# Altium PCB ctrl_boardV1.1.PcbDoc
Units mil, origin at the board's own origin, x right, y up, seen from the top; angles counter-clockwise.
Board outline 3779.53 x 2559.06 mil, 2 copper layers (Top Layer, Bottom Layer); 109 components, 77 nets, 363 pads, 1706 vias.
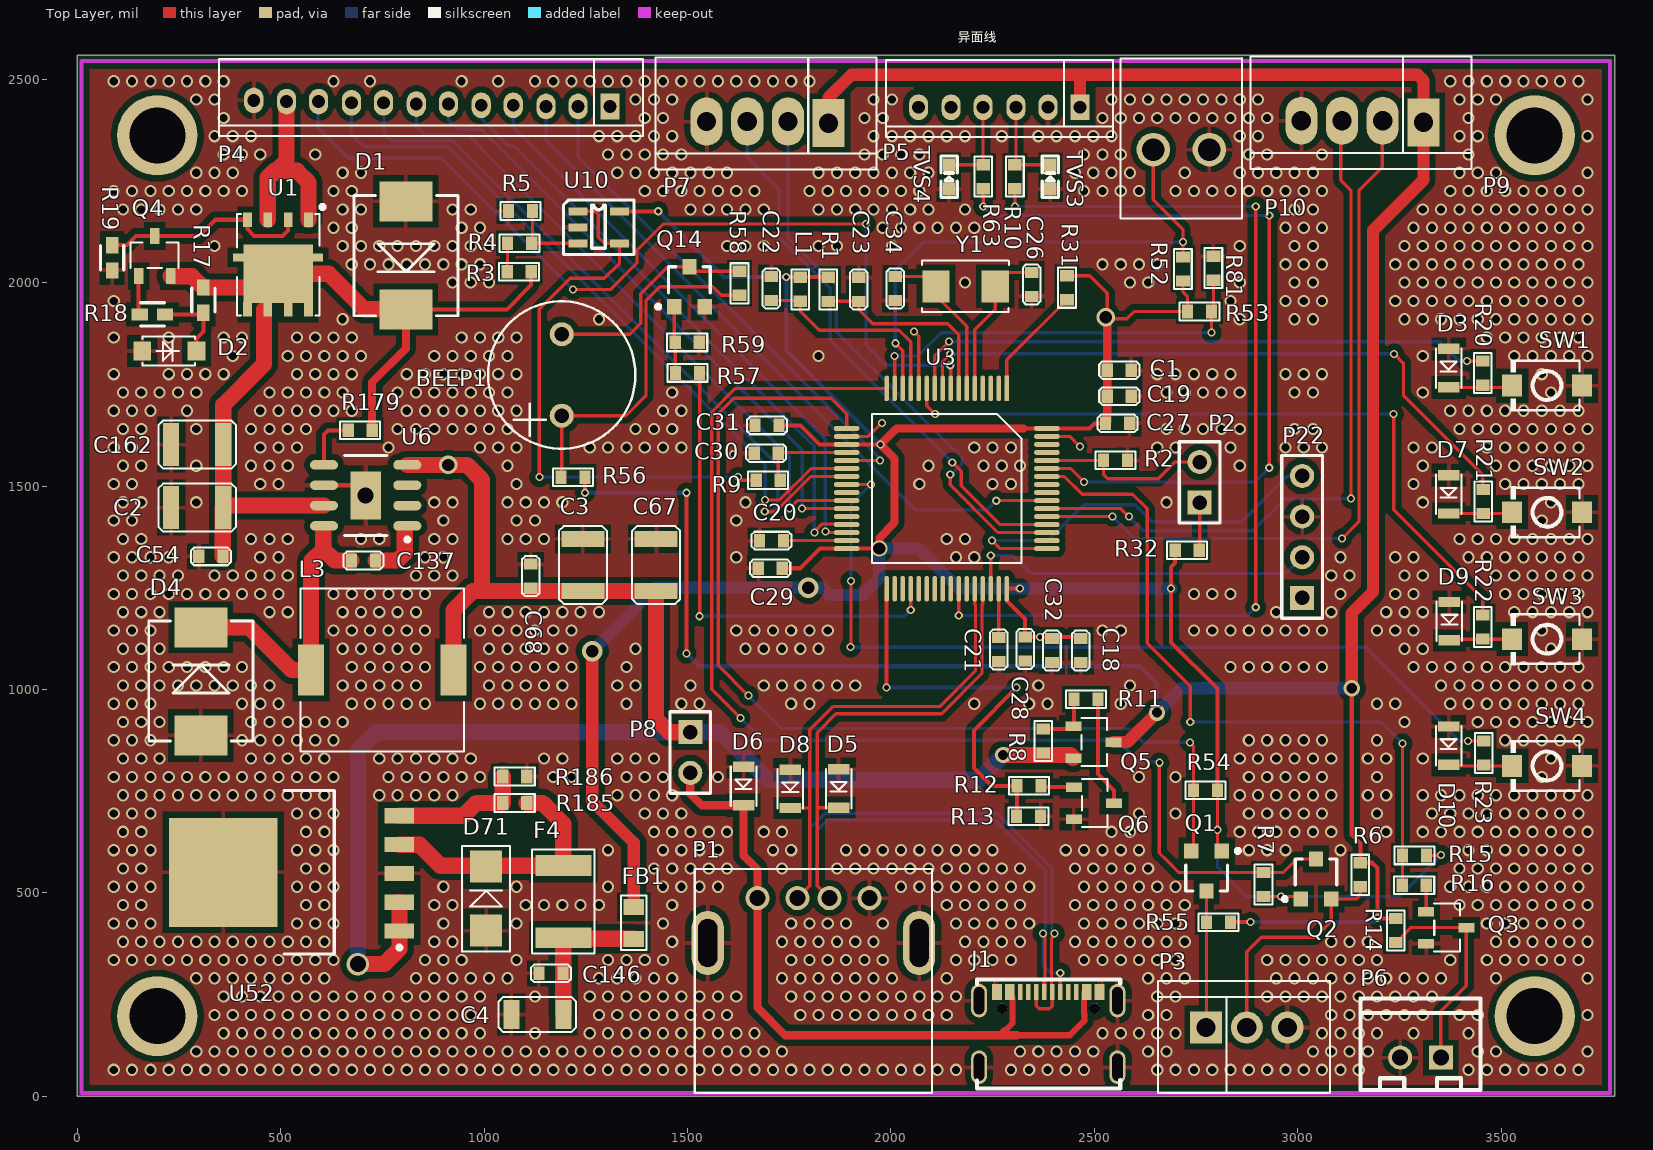
[diagram p0: Top Layer view]
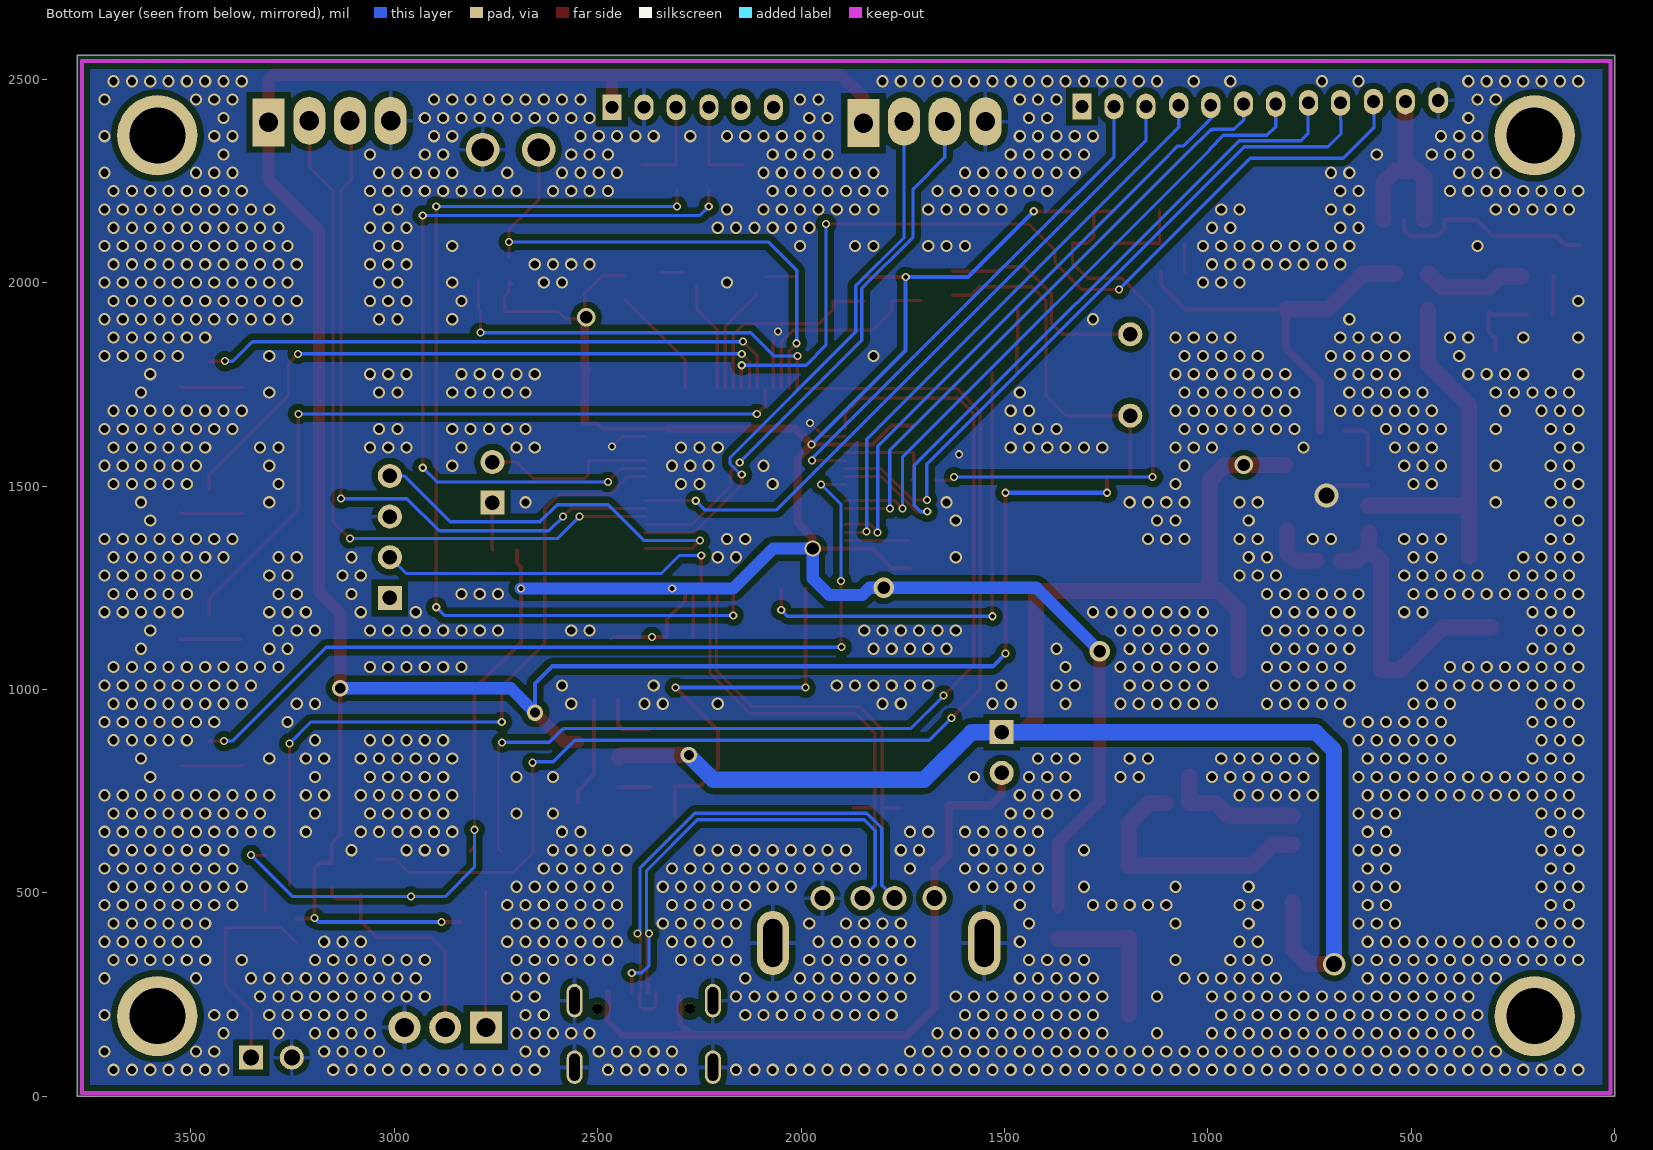
[diagram p1: Bottom Layer view, seen from below]

## Layer stack, top to bottom
Top Layer: signal copper 1.4
Dielectric: dielectric 12.6, FR-4, Dk 4.8
Bottom Layer: signal copper 1.4

## Board outline
0,0 3779.53,0 3779.53,2559.06 0,2559.06

## Design rules (kind name [scope] priority, off if disabled: settings)
Clearance Clearance_2 [USB_N And InPolygon] p1: gap=20
Clearance Clearance_1 [InPolygon] p2: gap=15
Clearance [All] p3: gap=5
DiffPairsRouting [All] p1: maxlimit=50 minlimit=8 mostfreqgap=8 maxuncoupledlength=500
PolygonConnect PolygonConnect_1 [IsVia] p1: connectstyle=Direct reliefconductorwidth=10 reliefentries=4 polygonreliefangle="90 Angle"
PolygonConnect [All] p2: connectstyle=Relief reliefconductorwidth=10 reliefentries=4 polygonreliefangle="90 Angle"
RoutingVias [All] p1: holewidth=28 width=50 viastyle="Through Hole" minholewidth=12 minwidth=20 maxholewidth=28 maxwidth=50
SilkscreenOverComponentPads [IsPad] p1: minsilkscreentomaskgap=2
SolderMaskExpansion [All] p1: expansion=4
Width [All] p1: maxlimit=200 minlimit=5 preferedwidth=10
26 further rules are at their usual default settings.

## Classes and differential pairs
component class connector: D5 D6 D8 J1 P1 P3 P4 P5 P6 P7 P9 Q1 Q2 Q3 R6 R7 R10 R14 R15 R16 R54 R55 R63 TVS3 TVS4
component class cpu: C1 C18 C19 C20 C21 C22 C23 C26 C27 C28 C29 C30 C31 C32 C34 D3 D7 D9 D10 FB1 L1 P2 P22 R1 R2 R3 R4 R5 R9 R20 R21 R22 R23 R31 R32 SW1 SW2 SW3 SW4 U3 U10 Y1
component class drv: BEEP1 Q14 R56 R57 R58 R59
component class power: C2 C3 C4 C54 C67 C68 C137 C146 C162 D1 D2 D4 D71 F4 L3 P8 Q4 Q5 Q6 R8 R11 R12 R13 R17 R18 R19 R179 R185 R186 U1 U6 U52
component class pt100: P10 R52 R53 R81
differential pair USB: +USB_P -USB_N

## Components (designator, comment, footprint, x,y, rotation, side; value= is the part's Value field where it differs from the comment)
BEEP1 "BEEP-9.5X5.5" BEEP-9.5X5.5 1191,1773 r90 top
C1 "0.1uF/50V/X5R" 0603C 2591,1785 r180 top
C2 "47uF/25V" 1210C 359,1447 r180 top
C3 "22uF/10V" 1210C 1243,1242 r90 top
C4 "47uF/25V" 1206C 1067,201 r0 top
C18 "1uF/50V/X5R" 0603C 2467,1066 r90 top
C19 "0.1uF/50V/X5R" 0603C 2591,1721 r180 top
C20 "0.1uF/50V/X5R" 0603C 1677,1366 r0 top
C21 "0.1uF/50V/X5R" 0603C 2265,1069 r90 top
C22 "0.1uF/50V/X5R" 0603C 1706,2015 r270 top
C23 "0.1uF/50V/X5R" 0603C 1921,2013 r270 top
C26 "12P 50V" 0603C 2346,1966 r90 top
C27 "1uF/50V/X5R" 0603C 2587,1654 r180 top
C28 "0.1uF/50V/X5R" 0603C 2330,1070 r90 top
C29 "1uF/50V/X5R" 0603C 1674,1298 r0 top
C30 "0.1uF/50V/X5R" 0603C 1664,1581 r0 top
C31 "1uF/50V/X5R" 0603C 1666,1649 r0 top
C32 "0.1uF/50V/X5R" 0603C 2396,1066 r90 top
C34 "12P 50V" 0603C 2011,1956 r90 top
C54 "1uF/50V/X5R" 0603C 299,1327 r0 top
C67 "22uF/10V" 1210C 1423,1242 r90 top
C68 "0.1uF/50V/X5R" 0603C 1115,1249 r90 top
C137 "0.01uF/50V" 0603C 674,1317 r0 top
C146 "0.1uF/50V/X5R" 0603C 1135,302 r0 top
C162 "47uF/25V" 1210C 359,1602 r180 top
D1 "SMCJ18CA" SMC 808,2200 r270 top
D2 "BZT52C18" sod123 160,1832 r0 top
D3 "CESDB5V0D3" SOD323 3371,1837 r270 top
D4 "SS54" SMC 304,887 r90 top
D5 "CESDB5V0D3" SOD323 1872,804 r270 top
D6 "CESDB5V0D3" SOD323 1638,810 r270 top
D7 "CESDB5V0D3" SOD323 3371,1527 r270 top
D8 "CESDB5V0D3" SOD323 1753,803 r270 top
D9 "CESDB5V0D3" SOD323 3373,1215 r270 top
D10 "CESDB5V0D3" SOD323 3371,909 r270 top
D71 "5.1V" SMA 1005,407 r90 top
F4 "1812L200/16GR" 1812-F 1195,567 r270 top
FB1 "JWWBW2012 M600HT" 0805CZ 1368,387 r90 top
J1 "TYPE C_16P" TYPEC_16P 2387,87 r0 top
L1 "MPZ1608D101BTA00" 0603R 1777,1954 r90 top
L3 "CDRH105NP-100NC" CDRH105 549,847 r90 top
P1 "Header 6" USB-A 1672,487 r0 top
P2 "Header 2" HDR1X2 2759,1459 r90 top
P3 "Header 3" 3X2.54MMZ 2775,169 r0 top
P4 "Header 12" 12X2MMZ 1310,2433 r180 top
P5 "Header 6" 6X2MMZ 2465,2431 r180 top
P6 "SIP-2" SIP-2A 3302,95 r180 top
P7 "Header 4" 4X2.54MMZ 1847,2392 r180 top
P8 "Header 2" HDR1X2 1507,895 r270 top
P9 "Header 4" 4X2.54MMZ 3309,2394 r180 top
P10 "Header 2" KF250NH-3.5-2P 2783,2327 r180 top
P22 "Header 4" HDR1X4 3011,1225 r90 top
Q1 "AO3400" SOT-23 2776,554 r180 top
Q2 "AO3400" SOT-23 3045,534 r0 top
Q3 "AO3400" SOT23-3 3316,454 r180 top
Q4 "MMBT4403-7-F" SOT23-3 151,2016 r270 top
Q5 "SI2301" SOT23-3 2449,910 r180 top
Q6 "S8050" SOT23-3 2450,760 r180 top
Q14 "LH8050QLT1G" SOT-23 1505,1990 r0 top
R1 "10K" 0603R 1846,2013 r270 top
R2 "10K" 0603R 2523,1563 r0 top
R3 "100K" 0603R 1116,2027 r180 top
R4 "100K" 0603R 1058,2097 r0 top
R5 "20K" 0603R 1119,2176 r180 top
R6 "10K" 0603r 3154,515 r90 top
R7 "10K" 0603r 2916,491 r90 top
R8 "100K" 0603R 2375,903 r270 top
R9 "49.9" 0603R 1669,1514 r0 top
R10 "100R" 0603R 2305,2290 r270 top
R11 "1K" 0603R 2509,976 r180 top
R12 "1K" 0603R 2369,763 r180 top
R13 "10K" 0603R 2309,688 r0 top
R14 "10K" 0603R 3241,378 r90 top
R15 "1k/1%" 0603R 3317,592 r180 top
R16 "1k/1%" 0603R 3316,519 r180 top
R17 "100k" RESC1608X055N_0603 310,1957 r90 top
R18 "1k/1%" RESC1608X055N_0603 185,1922 r180 top
R19 "10k" RESC1608X055N_0603 86,2061 r270 top
R20 "1k/1%" 0603R 3455,1748 r90 top
R21 "1k/1%" 0603R 3456,1432.51 r90 top
R22 "1k/1%" 0603R 3455,1124 r90 top
R23 "1k/1%" 0603R 3457,814 r90 top
R31 "100K" 0603R 2433,2017 r270 top
R32 "10K" 0603R 2758,1342 r180 top
R52 "2K/1%" 0603R 2718,2063 r270 top
R53 "2K/1%" 0603R 2788,1929 r180 top
R54 "10K" 0603r 2744,752 r0 top
R55 "10K" 0603r 2776,428 r0 top
R56 "51R" 0603R 1189,1522 r0 top
R57 "4.7K" 0603R 1530,1778 r180 top
R58 "1k/1%" 0603R 1628,2028 r270 top
R59 "47K" 0603R 1470,1853 r0 top
R63 "100R" 0603R 2227,2290 r270 top
R81 "75" 0603R 2793,2065 r270 top
R179 "100K" 0603R 666,1637 r0 top
R185 "120K/1%" 0603R 1105,721 r180 top
R186 "71.5K/1%" 0603R 1105,786 r180 top
SW1 "SW PUSHBUTTON" SW-SMD_L3.9-W3.0-P4.45 3613,1747 r180 top
SW2 "SW PUSHBUTTON" SW-SMD_L3.9-W3.0-P4.45 3613,1435.33 r180 top
SW3 "SW PUSHBUTTON" SW-SMD_L3.9-W3.0-P4.45 3613,1123.67 r180 top
SW4 "SW PUSHBUTTON" SW-SMD_L3.9-W3.0-P4.45 3613,812 r180 top
TVS3 "ESD5Z5.0CT1G" SOD-523 2392,2260 r90 top
TVS4 "ESD5Z5.0CT1G" SOD-523 2143,2260 r90 top
U1 "Si7997DP" "PowerPAK SO-8" 595,2192 r270 top
U3 "STM32F405RGT6" LQFP-64 2285,1740 r270 top
U6 "LM22676MRE-5.0/NOPB" SOP127P600X168_HS-8N 709,1477 r180 top
U10 "AD8615AUJZ-R2" sot-23-5 1282,2136 r0 top
U52 "MIC29302" TO228P1435X457-6N 792,406 r180 top
Y1 "8MHz" CRAY_5032 2111,1991 r0 top

## Footprints (in the part's own frame and the unit in brackets; to place one, negate y for a bottom-side part, rotate by r counter-clockwise, add the part's x,y. Pads: shape width x height; smd on the part's side, far side on the other; paste and mask are expansions set on the pad)
3X2.54MMZ [mm]
  rect 2x2 hole 1.2: 1(0,0)
  round 2 hole 1.2: 2(2.54,0) 3(5.08,0)
  silkscreen extent -3,-4.1 7.75,2.9
4X2.54MMZ [mm]
  rect 2x3 hole 1.2: 1(0,0)
  oval 2x3 hole 1.2: 2(2.54,-0.1) 3(5.08,-0.1) 4(7.62,-0.1)
  silkscreen extent -3,-4.1 10.79,2.9
6X2MMZ [mm]
  rect 1.2x1.6 hole 0.8: 1(0,0)
  oval 1.2x1.6 hole 0.8: 2(2,0) 3(4,0) 4(6.05,0) 5(8.05,0) 6(10.08,0)
  silkscreen extent -2.05,-2.95 12.12,1.85
12X2MMZ [mm]
  rect 1.2x1.6 hole 0.8: 1(0,0)
  oval 1.2x1.6 hole 0.8: 2(2,0) 3(4,0) 4(6.05,-0.076) 5(8.05,-0.076) 6(10.1,-0.152) 7(12.1,-0.152) 8(14.15,-0.229) 9(16.15,-0.229) 10(18.2,-0.305) 11(20.2,-0.305) 12(22.25,-0.381)
  silkscreen extent -2.05,-2.95 24.43,1.85
0603C [mm]
  rect 0.7x0.85 smd: 1(0,0) 2(1.5,0)
  silkscreen extent -0.5,-0.55 2,0.55
0603R [mm]
  rect 0.7x0.85 smd: 1(0,0) 2(1.5,0)
  silkscreen extent -0.5,-0.55 2,0.55
0603r [mm]
  rect 0.7x0.85 smd: 1(0,0) 2(1.5,0)
  silkscreen extent -0.5,-0.55 2,0.55
0805CZ [mm]
  rect 1x1.3 smd: 1(0,0) 2(2,0)
  silkscreen extent -0.7,-0.8 2.7,0.8
1206C [mm]
  rect 1x1.8 smd: 1(0,0) 2(3.25,0)
  silkscreen extent -0.8,-1.1 4.05,1.1
1210C [mm]
  rect 1x2.7 smd: 1(0,0) 2(3.25,0)
  silkscreen extent -0.8,-1.5 4.05,1.5
1812-F [mm]
  rect 1.3x3.5 smd: 1(0,0) 2(4.5,0)
  silkscreen extent -1,-1.95 5.5,1.95
BEEP-9.5X5.5 [mm]
  round 1.5 hole 0.9: 1(-2.54,0) 2(2.54,0)
  silkscreen extent -4.6,-4.6 4.6,4.6
CDRH105 [mm]
  rect 3.2x1.6 smd: 1(5.1,-0.65) 2(5.1,-9.55)
  silkscreen extent 0,-10.2 10.2,0
CRAY_5032 [mm]
  rect 1.7x2 smd: 1(0,0) 2(3.7,0)
  silkscreen extent -0.86,-1.6 4.55,1.6
HDR1X2 [mm] "Connector; Header; 2 Position"
  rect 1.5x1.5 hole 0.9: 1(0,0)
  round 1.5 hole 0.9: 2(2.54,0)
  silkscreen extent -1.27,-1.27 3.81,1.27
HDR1X4 [mm] "Connector; Header; 4 Position"
  rect 1.5x1.5 hole 0.9: 1(0,0)
  round 1.5 hole 0.9: 2(2.54,0) 3(5.08,0) 4(7.62,0)
  silkscreen extent -1.27,-1.27 8.89,1.27
KF250NH-3.5-2P [mm]
  round 2.1 hole 1.41: 1(0,0) 2(3.5,0)
  silkscreen extent -2.05,-5.71 5.55,4.3
LQFP-64 [mm]
  rect 1.6x0.3 smd: 1(0,0)
  oval 1.6x0.3 smd: 2(0,-0.5) 3(0,-1) 4(0,-1.5) 5(0,-2) 6(0,-2.5) 7(0,-3) 8(0,-3.5) 9(0,-4) 10(0,-4.5) 11(0,-5) 12(0,-5.5) 13(0,-6) 14(0,-6.5) 15(0,-7) 16(0,-7.5) 33(12.5,-7.5) 34(12.5,-7) 35(12.5,-6.5) 36(12.5,-6) 37(12.5,-5.5) 38(12.5,-5) 39(12.5,-4.5) 40(12.5,-4) 41(12.5,-3.5) 42(12.5,-3) 43(12.5,-2.5) 44(12.5,-2) 45(12.5,-1.5) 46(12.5,-1) 47(12.5,-0.5) 48(12.5,0)
  oval 0.3x1.6 smd: 17(2.5,-10) 18(3,-10) 19(3.5,-10) 20(4,-10) 21(4.5,-10) 22(5,-10) 23(5.5,-10) 24(6,-10) 25(6.5,-10) 26(7,-10) 27(7.5,-10) 28(8,-10) 29(8.5,-10) 30(9,-10) 31(9.5,-10) 32(10,-10) 49(10,2.5) 50(9.5,2.5) 51(9,2.5) 52(8.5,2.5) 53(8,2.5) 54(7.5,2.5) 55(7,2.5) 56(6.5,2.5) 57(6,2.5) 58(5.5,2.5) 59(5,2.5) 60(4.5,2.5) 61(4,2.5) 62(3.5,2.5) 63(3,2.5) 64(2.5,2.5)
  silkscreen extent 1.59,-8.41 10.91,0.91
"PowerPAK SO-8" [mm]
  rect 0.9x0.54 smd: 1(0.95,-0.67) 2(0.95,-1.94) 3(0.95,-3.21) 4(0.95,-4.48) 5(6.548,-4.48) 6(6.548,-3.21) 7(6.548,-1.94) 8(6.548,-0.67)
  rect 0.5x1.6 smd: 5(3.3,-4.575) 8(3.3,-0.575)
  rect 3.66x2.5 smd: 5(4.325,-3.495)
  rect 3.66x2 smd: 8(4.325,-1.401)
  silkscreen extent 0.03,-5.12 6.93,0.33
RESC1608X055N_0603 [mil] "Chip Resistor, 0603"
  round 10 on Mech3: 0(0,0)
  rect 40x30 smd: 1(-30.98,0) 2(30.98,0)
  silkscreen extent -30,-29 30,29, body extent -31,-16 31,16, height 22
SIP-2A [mm]
  rect 1.5x1.5 hole 1: 1(-1.27,0)
  round 1.5 hole 1: 2(1.27,0)
  silkscreen extent -3.75,-3.68 3.75,2.02, body extent -3.7,-3.81 3.7,2.29, height 7.5
SMA [mm]
  rect 2x2 smd: 1(0,0) 2(4,0)
  silkscreen extent -1.3,-1.5 5.3,1.5
SMC [mm]
  rect 2.5x3.3 smd: 1(0,0) 2(6.75,0)
  silkscreen extent -0.35,-3.25 7.15,3.25
sod123 [mm]
  rect 1.1x1.2 smd: 1(0,0) 2(3.385,0)
  silkscreen extent 0,-0.9 3.3,0.9
SOD323 [mm]
  rect 0.65x1.35 smd: 1(0,0) 2(2.4,0)
  silkscreen extent -0.03,-0.8 2.44,0.8
SOD-523 [mil]
  rect 31.5x30 smd: 1(-30,0) 2(30,0)
  silkscreen extent -51,-20 51,20, body extent -31,-16 31,16, height 26
SOP127P600X168_HS-8N [mm] "SOP, 8-Leads, Body 5.0x4.0mm (max), Pitch 1.27mm, IPC Medium Density"
  oval 1.75x0.6 smd: 1(-2.6,1.905) 2(-2.6,0.635) 3(-2.6,-0.635) 4(-2.6,-1.905) 5(2.6,-1.905) 6(2.6,-0.635) 7(2.6,0.635) 8(2.6,1.905)
  rect 1.9x3 smd: 9(0,0)
  silkscreen extent -2.73,-2.5 1.33,2.88, body extent -2,-2.5 2,2.5, height 1.68
SOT23-3 [mm] "SOT-23; 3 Leads; Body 3.0 x 2.6 mm, inc. leads (LxW max)"
  rect 1x0.6 smd: 1(0,0) 2(0,2) 3(-2.5,1)
  silkscreen extent -2.1,-0.5 -0.5,2.5
SOT-23 [mm] "SOT-23; 3 Leads; Body 3.0 x 2.6 mm, inc. leads (LxW max)"
  rect 0.9x0.95 smd: 1(-0.95,-1.25) 2(0.95,-1.25) 3(0,1.25)
  silkscreen extent -2.08,-1.37 1.3,1.25
sot-23-5 [mm]
  rect 1.2x0.5 smd: 1(-1.3,1) 2(-1.3,0) 3(-1.3,-1) 4(1.3,-1) 5(1.3,1)
  silkscreen extent -2.2,-1.7 2.2,1.7
SW-SMD_L3.9-W3.0-P4.45 [mm]
  rect 1.23x1.36 smd: 1(-2.185,0) 2(2.185,0)
  silkscreen extent -2.03,-1.62 2.25,1.62
TO228P1435X457-6N [mm] "D2-PAK, 6-Pads, Body 8.6x10.2mm (max), IPC Medium Density"
  rect 1.85x0.95 smd: 1(0,0) 2(0,-1.8) 3(0,-3.6) 4(0,-5.4) 5(0,-7.2)
  rect 6.8x6.8 smd: 6(11,-3.671)
  silkscreen extent -0.13,-8.77 7.2,1.43, body extent 4.2,-8.77 12.84,1.43, height 4.57
TYPEC_16P [mm]
  oval 1x2.1 hole 0.65 slot 1.7 at 90 deg: 1(-4.32,-0.391) 1(-4.32,3.759) 1(4.32,-0.391) 1(4.32,3.759)
  round 0.67 hole 0.67: 2(-2.89,3.259) 2(2.89,3.259)
  rect 0.3x1 smd: A1(-3.05,4.293) A4(-2.25,4.293) A5(-1.25,4.293) A6(-0.25,4.293) A7(0.25,4.293) A8(1.25,4.293) A9(2.25,4.293) A12(3.35,4.293) B1(3.05,4.293) B4(2.55,4.293) B5(1.75,4.293) B6(0.75,4.293) B7(-0.75,4.293) B8(-1.75,4.293) B9(-2.55,4.293) B12(-3.35,4.293)
  silkscreen extent -4.44,-1.73 4.49,5.07
USB-A [mm]
  round 1.5 hole 1: 1(0,0) 2(2.5,0) 3(4.5,0) 4(7,0)
  oval 2x4 hole 1.2 slot 3 at 90 deg: 5(-3.1,-2.8) 6(10.1,-2.8)
  silkscreen extent -3.91,-12.17 10.89,1.83

## Part data
C1 C18 C19 C20 C21 C22 C23 C26 C27 C28 C29 C30 C31 C32 C34: library part CAP4, "贴片电容 20%"
C2 C3 C54 C67 C68 C137 C162: library part CAP, "Capacitor"
C4 C146: library part Cap, "Capacitor"
D1 D3 D4 D5 D6 D7 D8 D9 D10 D71: library part "DIODE S", "Schottky Diode"
D2: library part BZT52C12S-7-F
F4: library part "Fuse 1", "Fuse"
FB1: library part FB
L1: library part CIZHU1, "磁珠电感 100R 100MHz"
L3: library part INDUCTOR
P1 P5: "Header, 6-Pin"
P2 P8: "Header, 2-Pin"
P3: "Header, 3-Pin"
P4: "Header, 12-Pin"
P6: "XH2.54 2P 立贴"
P7 P9 P22: "Header, 4-Pin"
Q1 Q2 Q3 Q14: library part NPN-1, "NPN"
Q4: library part OEM_Diodes_MMBT4403
Q5: library part MOSFET-P, "P-Channel MOSFET"
Q6: library part NPN, "NPN Bipolar Transistor"
R1 R2 R10 R31 R32 R63: library part RES2, "贴片电阻 5%"
R3 R4 R5 R8 R9 R11 R12 R13 R14 R15 R16 R179: library part Res1, "Resistor"
R6 R7 R54 R55: library part R, "贴片电阻 1%"
R17 R18 R19: library part Resistor_0603
R20 R21 R22 R23: library part RESISTOR_0
R52 R53 R81: library part R
R56 R57 R58 R59: library part RES0, "贴片电阻 5%"
R185 R186: library part R, "R"
TVS3 TVS4: library part TVS-1, "TVS"
U1: "Sia430DJ"
U3: library part STM32F405RG, "MCU"
U6: library part LM22676MR-5.0
U10: library part AD8615
Y1: library part XTAL, "晶振"

## Free pads (board coordinates)
  round 196.85 hole 137.8: 1(196.85,196.85) 1(196.85,2362.2) 1(3582.68,196.85) 1(3582.68,2362.2)

## Via types
v1: diameter 30, hole 20, Top Layer to Bottom Layer, tented both sides, 1622 vias
v2: diameter 20, hole 12, Top Layer to Bottom Layer, tented both sides, 74 vias
v3: diameter 40, hole 25, Top Layer to Bottom Layer, tented both sides, 3 vias
v4: diameter 45, hole 30, Top Layer to Bottom Layer, tented both sides, 2 vias
v5: diameter 50, hole 30, Top Layer to Bottom Layer, tented both sides, 2 vias
v6: diameter 59.06, hole 39.37, Top Layer to Bottom Layer, 1 vias
v7: diameter 55, hole 40, Top Layer to Bottom Layer, tented both sides, 1 vias
v8: diameter 40, hole 30, Top Layer to Bottom Layer, tented both sides, 1 vias

## Nets (pads, with @x,y where several pads share a name; then routed paths per layer and width w, separated by ;. In a path a pad name is that pad's centre, name@x,y a point inside that pad or via, vN(x,y) a via of type N, cw(c..) or ccw(c..) an arc to the next point about the centre after c; other vN are vias at no path point)
3.3V_MCU: P22.1
air_FREQ: R15.2 R16.2 U3.58 | length 1738.3
  Top Layer w8: U3.58 2426.54,1523.46 2470,1480 2594,1480 2630,1444 2630,1114 2736,1008 v2(2736,920) ; R16.2@3257.94,520 R15.2 v2(3257.94,867.06)
  Bottom Layer w8: v2(2736,920) 3205,920 v2(3257.94,867.06)
air_pwr: P4.10 U3.8 | length 2246.9
  Top Layer w8: v2(1219,1983) 1310,1983 1376,2049 1376,2080 1440,2144 v2(1939,2144) ; v2(2146,1797) 2147.2,1795.8 U3.8
  Bottom Layer w8: P4.10@595,2446 593,2446 592,2445 592,2381 667,2306 810.17,2306 815,2306 896,2306 v2(1219,1983) ; v2(1939,2144) 1939,1846 1988,1797 v2(2146,1797)
air_RXD: Q2.3 R7.2 U3.16 | length 3001.6
  Top Layer w8: 1560,1620 1560,1584 ; v2(1630,930) 1560,1000 1560,1584 ; U3.16 1618,1740 1560,1682 1560,1584 ; v2(2660,820) 2660,598 2684,574 ; 2673,585 2684,574 ; Q2.3 2998.21,583.21 2965.06,550.06 R7.2 2707.94,550.06 2684,574
  Bottom Layer w8: v2(1630,930) 1685,875 2556,875 2609,822 v2@2660,822
air_TXD: Q1.2 R54.1 U3.17 | length 2511.5
  Top Layer w8: v2(1650,985) 1576,1059 1576,1678 1614,1716 1853,1716 1891.3,1677.7 U3.17 ; v2(2735,870) 2744,861 R54.1 2744,608.61 Q1.2
  Bottom Layer w8: v2(1650,985) 1731,904 2583,904 2586,901 ; 2587,902 2619,870 v2(2735,870)
BAT_CHARGE: P4.11 U1.1 U1.3 | length 507.4
  Top Layer w40: U1.3 468.62,2258.62 485,2275 489,2275 ; 480,2266 489,2275 ; P4.11 514.72,2300.72 489,2275 ; 541,2274 568.62,2246.38 U1.1 ; 541,2275 489,2275
BATTERY: R9.1 U10.1 U10.4 | length 1409.6
  Top Layer w8: v2(1136,1522) 1136,1935 1212,2011 1296,2011 1333.18,2048.18 U10.4 1296.37,2096.63 1281,2112 1281,2168 1273.63,2175.37 U10.1 ; v2(1624,1522) 1632,1514 R9.1
  Bottom Layer w8: v2(1136,1522) v2(1624,1522)
ble_rxd: P7.3 U3.52 | length 1362.9
  Top Layer w8: v2(2151,1558) 2173,1536 2173,1501 2268.65,1405.35 U3.52
  Bottom Layer w8: P7.3 1647,2308 1725,2230 1725,2112 1851.1,1985.9 1851.1,1857.9 v2(2151,1558)
ble_txd: P7.2 U3.51 | length 1370.3
  Top Layer w8: v2(2146,1528) 2146,1503 2263.33,1385.67 U3.51
  Bottom Layer w8: P7.2 1747,2111 1866,1992 1866,1879 2174.94,1570.06 2174.94,1555.07 2147.87,1528 v2(2146,1528) v2@2146,1529
BOOT0: P2.2 R2.1 U3.60 | length 431.5
  Top Layer w8: U3.60 R2.1@2522.83,1562.83 ; R2.1 2523,1528 2533,1518 2657,1518 2698,1559 P2.2
cool1: P4.2 U3.21 | length 1259.6
  Top Layer w8: U3.21 v2(1973.17,1562.83)
  Bottom Layer w8: P4.2 1231.26,2308.74 1321,2219 ; 1321.5,2219.5 1973.17,1567.83 v2(1973.17,1562.83)
COOL2: P4.3 U3.55 | length 1700.7
  Top Layer w8: v2(2259,1464) 2259.41,1464.41 U3.55
  Bottom Layer w8: P4.3 1152.52,2348.48 1241,2260 ; 1241.5,2260.5 2061,1441 2236,1441 v2(2259,1464)
cool3: P4.5 U3.29 | length 1487.1
  Top Layer w8: v2(1812,1386) 1812,1387.87 1831.13,1407 1889.65,1407 U3.29
  Bottom Layer w8: P4.5 993.07,2402.93 1060,2336 1074,2336 1097,2313 ; 1096.91,2312.91 1812,1597.81 v2(1812,1386)
cool4: P4.4 U3.30 | length 1419
  Top Layer w8: v2(1839,1388) 1841.33,1385.67 U3.30
  Bottom Layer w8: P4.4 1071.81,2382.19 1839,1615 v2(1839,1388)
dec: R23.2 U3.24 | length 2130.1
  Top Layer w8: U3.24 v2(1950.78,1503.78) ; v2@1902,1105 v2(1902,1267) ; v2(3418.37,873.06) R23.2
  Bottom Layer w8: v2(1901,1104) 3167.74,1104 3398.68,873.06 v2(3418.37,873.06) ; v2(1902,1267) 1902,1455 v2(1950.78,1503.78)
GND: C1.1 C2.2 C3.2 C4.1 C18.1 C19.1 C20.1 C21.1 C22.1 C23.1 C26.1 C27.1 C28.1 C29.1 C30.1 C31.1 C32.1 C34.1 C54.1 C67.2 C68.2 C146.1 C162.2 D1.1 D2.1 D3.1 D4.1 D5.1 D6.1 D7.1 D8.1 D9.1 D10.1 D71.1 J1.1 J1.A1 J1.A12 J1.B1 J1.B12 P1.4 P1.5 P1.6 P3.3 P4.12 P5.2 P6.2 P7.4 P9.4 P10.1 P22.3 Q3.2 Q6.2 Q14.2 R2.2 R5.2 R13.2 R19.2 R59.2 R81.1 R186.1 SW1.1 SW2.1 SW3.1 SW4.1 TVS3.1 TVS4.1 U3.12 U3.18 U3.63 U6.6 U6.9 U10.2 U52.3 U52.6 | length 414.4
  Top Layer w8: U3.18 1944.89,1621.89 v2(1978,1655) ; v2(2057,1880) 2068.46,1868.54 U3.12 ; U3.63 2440.11,1621.89 v2(2465,1597)
  Top Layer w10: U6.6 U6.9@684,1502
  other v1: 90,65 135,65 180,65 225,65 270,65 315,65 360,65 405,65 450,65 495,65 540,65 585,65 630,65 675,65 720,65 765,65 810,65 855,65 900,65 945,65 990,65 1035,65 1080,65 1125,65 1170,65 1215,65 1260,65 1305,65 1350,65 1395,65 1440,65 1485,65 1530,65 1575,65 1620,65 1665,65 1710,65 1755,65 1800,65 1845,65 1890,65 1935,65 1980,65 2025,65 2070,65 2115,65 2160,65 2295,65 2340,65 2385,65 2430,65 2475,65 2655,65 2700,65 2745,65 2790,65 2835,65 2880,65 2925,65 2970,65 3015,65 3060,65 3105,65 3150,65 3420,65 3465,65 3510,65 3555,65 3600,65 3645,65 3690,65 292.5,110 337.5,110 382.5,110 427.5,110 472.5,110 517.5,110 562.5,110 607.5,110 652.5,110 697.5,110 742.5,110 787.5,110 832.5,110 877.5,110 922.5,110 967.5,110 1012.5,110 1057.5,110 1102.5,110 1147.5,110 1192.5,110 1237.5,110 1282.5,110 1327.5,110 1372.5,110 1417.5,110 1462.5,110 1507.5,110 1552.5,110 1597.5,110 1642.5,110 1687.5,110 1732.5,110 2317.5,110 2362.5,110 2407.5,110 2452.5,110 2497.5,110 2632.5,110 2677.5,110 3037.5,110 3082.5,110 3127.5,110 3172.5,110 3442.5,110 3487.5,110 3712.5,110 360,155 405,155 450,155 495,155 540,155 585,155 630,155 675,155 720,155 765,155 810,155 855,155 900,155 945,155 990,155 1125,155 1260,155 1305,155 1350,155 1395,155 1440,155 1485,155 1530,155 1575,155 1620,155 1665,155 2520,155 2565,155 2610,155 2655,155 2700,155 3060,155 3105,155 3150,155 3195,155 3285,155 3420,155 337.5,200 382.5,200 427.5,200 472.5,200 517.5,200 562.5,200 607.5,200 652.5,200 697.5,200 742.5,200 787.5,200 832.5,200 877.5,200 922.5,200 967.5,200 1282.5,200 1327.5,200 1372.5,200 1417.5,200 1462.5,200 1507.5,200 1552.5,200 1597.5,200 1777.5,200 1822.5,200 1867.5,200 1912.5,200 1957.5,200 2002.5,200 2047.5,200 2092.5,200 2137.5,200 2632.5,200 2677.5,200 3082.5,200 3127.5,200 3172.5,200 3217.5,200 3262.5,200 3307.5,200 3397.5,200 3442.5,200 3712.5,200 360,245 405,245 450,245 495,245 540,245 585,245 630,245 675,245 720,245 765,245 810,245 855,245 900,245 945,245 990,245 1125,245 1260,245 1305,245 1350,245 1395,245 1440,245 1485,245 1530,245 1575,245 1620,245 1755,245 1800,245 1845,245 1890,245 1935,245 1980,245 2025,245 2070,245 2115,245 2160,245 2655,245 2700,245 2925,245 2970,245 3015,245 3060,245 3105,245 3150,245 3195,245 3240,245 3285,245 3330,245 292.5,290 337.5,290 382.5,290 427.5,290 472.5,290 517.5,290 562.5,290 607.5,290 832.5,290 877.5,290 922.5,290 967.5,290 1012.5,290 1057.5,290 1282.5,290 1327.5,290 1372.5,290 1417.5,290 1462.5,290 1732.5,290 1777.5,290 1822.5,290 1867.5,290 1912.5,290 1957.5,290 2002.5,290 2137.5,290 2632.5,290 2677.5,290 2722.5,290 2947.5,290 2992.5,290 3037.5,290 3082.5,290 3127.5,290 3172.5,290 3217.5,290 3262.5,290 3307.5,290 3352.5,290 3487.5,290 3712.5,290 90,335 135,335 180,335 225,335 270,335 315,335 360,335 405,335 450,335 495,335 540,335 585,335 630,335 855,335 900,335 945,335 1080,335 1305,335 1350,335 1395,335 1440,335 1755,335 1800,335 1845,335 1890,335 1935,335 1980,335 2160,335 2205,335 2250,335 2295,335 2475,335 2520,335 2565,335 2610,335 2655,335 2700,335 2925,335 2970,335 3015,335 3060,335 3105,335 3150,335 3195,335 3375,335 3465,335 3510,335 3555,335 3600,335 3645,335 3690,335 112.5,380 157.5,380 202.5,380 247.5,380 292.5,380 337.5,380 382.5,380 427.5,380 472.5,380 517.5,380 562.5,380 607.5,380 877.5,380 922.5,380 1462.5,380 1732.5,380 1777.5,380 1822.5,380 1867.5,380 1912.5,380 1957.5,380 2182.5,380 2227.5,380 2272.5,380 2317.5,380 2452.5,380 2497.5,380 2542.5,380 2587.5,380 2632.5,380 2677.5,380 2722.5,380 3082.5,380 3127.5,380 3172.5,380 3487.5,380 3532.5,380 3577.5,380 3622.5,380 3667.5,380 3712.5,380 90,425 135,425 180,425 540,425 585,425 630,425 900,425 1080,425 1440,425 1755,425 1800,425 1845,425 1890,425 1980,425 2160,425 2205,425 2250,425 2295,425 2340,425 2475,425 2520,425 2565,425 2610,425 2655,425 2700,425 3465,425 3510,425 3555,425 3600,425 3645,425 3690,425 112.5,470 157.5,470 562.5,470 607.5,470 877.5,470 922.5,470 1102.5,470 1147.5,470 1192.5,470 1237.5,470 1282.5,470 1462.5,470 2137.5,470 2182.5,470 2227.5,470 2272.5,470 2317.5,470 2452.5,470 2497.5,470 2542.5,470 2587.5,470 2632.5,470 2677.5,470 2722.5,470 3397.5,470 3442.5,470 3487.5,470 3532.5,470 3577.5,470 3622.5,470 3667.5,470 3712.5,470 90,515 135,515 180,515 540,515 585,515 630,515 900,515 1080,515 1305,515 1440,515 1485,515 1530,515 1575,515 2025,515 2070,515 2115,515 2160,515 2205,515 2250,515 2295,515 2340,515 2475,515 2520,515 2565,515 2610,515 2655,515 2700,515 3375,515 3420,515 3465,515 3510,515 3555,515 3600,515 3645,515 3690,515 112.5,560 157.5,560 562.5,560 607.5,560 1417.5,560 1462.5,560 1507.5,560 1552.5,560 1597.5,560 1732.5,560 1867.5,560 1912.5,560 1957.5,560 2002.5,560 2047.5,560 2092.5,560 2137.5,560 2182.5,560 2227.5,560 2272.5,560 2317.5,560 2452.5,560 2497.5,560 2542.5,560 2587.5,560 2632.5,560 3397.5,560 3442.5,560 3487.5,560 3532.5,560 3577.5,560 3622.5,560 3667.5,560 3712.5,560 90,605 135,605 180,605 540,605 585,605 630,605 1305,605 1440,605 1485,605 1530,605 1575,605 1710,605 1755,605 1890,605 1935,605 1980,605 2025,605 2070,605 2115,605 2160,605 2205,605 2250,605 2430,605 2475,605 2520,605 2565,605 2610,605 2880,605 2925,605 2970,605 3105,605 3420,605 3465,605 3510,605 3555,605 3600,605 3645,605 3690,605 112.5,650 157.5,650 562.5,650 607.5,650 1417.5,650 1462.5,650 1507.5,650 1552.5,650 1597.5,650 1687.5,650 1732.5,650 2542.5,650 2587.5,650 2857.5,650 2902.5,650 2947.5,650 2992.5,650 3037.5,650 3082.5,650 3217.5,650 3307.5,650 3352.5,650 3397.5,650 3442.5,650 3487.5,650 3532.5,650 3577.5,650 3622.5,650 3667.5,650 3712.5,650 90,695 135,695 180,695 540,695 585,695 630,695 1395,695 1440,695 1485,695 2610,695 2700,695 2880,695 2925,695 2970,695 3015,695 3060,695 3195,695 3330,695 3375,695 3420,695 3465,695 3510,695 3555,695 3600,695 3645,695 3690,695 112.5,740 157.5,740 202.5,740 247.5,740 292.5,740 337.5,740 382.5,740 427.5,740 472.5,740 517.5,740 562.5,740 607.5,740 742.5,740 787.5,740 832.5,740 877.5,740 922.5,740 1327.5,740 1372.5,740 1417.5,740 1462.5,740 2857.5,740 2902.5,740 2947.5,740 2992.5,740 3037.5,740 3082.5,740 3172.5,740 3217.5,740 3307.5,740 3352.5,740 3397.5,740 3442.5,740 3487.5,740 3532.5,740 3577.5,740 3622.5,740 3667.5,740 3712.5,740 90,785 135,785 180,785 225,785 270,785 315,785 360,785 405,785 450,785 495,785 540,785 585,785 630,785 765,785 810,785 855,785 900,785 945,785 990,785 1170,785 1215,785 1350,785 1395,785 1440,785 1575,785 2610,785 2700,785 2880,785 2925,785 2970,785 3015,785 3060,785 3195,785 3600,785 112.5,830 157.5,830 202.5,830 427.5,830 472.5,830 517.5,830 562.5,830 607.5,830 742.5,830 787.5,830 832.5,830 877.5,830 922.5,830 967.5,830 1147.5,830 1192.5,830 1327.5,830 1372.5,830 1417.5,830 2857.5,830 2902.5,830 2947.5,830 2992.5,830 3037.5,830 3082.5,830 3172.5,830 3217.5,830 3307.5,830 3622.5,830 90,875 135,875 180,875 405,875 450,875 495,875 540,875 585,875 630,875 2880,875 2925,875 2970,875 3015,875 3060,875 3195,875 3510,875 3555,875 3600,875 3645,875 3690,875 112.5,920 157.5,920 202.5,920 427.5,920 472.5,920 517.5,920 562.5,920 607.5,920 652.5,920 3262.5,920 3442.5,920 3487.5,920 3532.5,920 3577.5,920 3622.5,920 3667.5,920 3712.5,920 90,965 135,965 180,965 405,965 450,965 495,965 675,965 720,965 765,965 810,965 855,965 990,965 1035,965 1080,965 1125,965 1170,965 1215,965 1350,965 1485,965 1530,965 1755,965 1800,965 2205,965 2340,965 2385,965 2565,965 3195,965 3240,965 3375,965 3420,965 3465,965 3510,965 3555,965 3600,965 3645,965 3690,965 112.5,1010 157.5,1010 202.5,1010 247.5,1010 292.5,1010 337.5,1010 382.5,1010 427.5,1010 472.5,1010 652.5,1010 697.5,1010 742.5,1010 787.5,1010 832.5,1010 1012.5,1010 1057.5,1010 1102.5,1010 1147.5,1010 1192.5,1010 1327.5,1010 1372.5,1010 1507.5,1010 1687.5,1010 1732.5,1010 1777.5,1010 1822.5,1010 1867.5,1010 1912.5,1010 2362.5,1010 2587.5,1010 3352.5,1010 3397.5,1010 3442.5,1010 3487.5,1010 3532.5,1010 3577.5,1010 3622.5,1010 3667.5,1010 3712.5,1010 90,1055 135,1055 180,1055 225,1055 270,1055 315,1055 360,1055 405,1055 675,1055 720,1055 765,1055 810,1055 855,1055 990,1055 1035,1055 1080,1055 1125,1055 1170,1055 1215,1055 1350,1055 2835,1055 2880,1055 2925,1055 2970,1055 3015,1055 3060,1055 3285,1055 3330,1055 3375,1055 3420,1055 3465,1055 3510,1055 3555,1055 3600,1055 3645,1055 3690,1055 112.5,1100 157.5,1100 202.5,1100 652.5,1100 697.5,1100 742.5,1100 787.5,1100 832.5,1100 1012.5,1100 1057.5,1100 1102.5,1100 1147.5,1100 1192.5,1100 1372.5,1100 1642.5,1100 1687.5,1100 1732.5,1100 1777.5,1100 1822.5,1100 3262.5,1100 3307.5,1100 3622.5,1100 90,1145 135,1145 180,1145 630,1145 675,1145 720,1145 765,1145 810,1145 855,1145 990,1145 1035,1145 1080,1145 1125,1145 1170,1145 1215,1145 1620,1145 1665,1145 1710,1145 1755,1145 1800,1145 1845,1145 2520,1145 2565,1145 2745,1145 2790,1145 2835,1145 2880,1145 2925,1145 2970,1145 3015,1145 3060,1145 3195,1145 3240,1145 3285,1145 3600,1145 112.5,1190 157.5,1190 202.5,1190 472.5,1190 517.5,1190 652.5,1190 697.5,1190 742.5,1190 787.5,1190 832.5,1190 1012.5,1190 1057.5,1190 1102.5,1190 1147.5,1190 1192.5,1190 1237.5,1190 1282.5,1190 2947.5,1190 3082.5,1190 3217.5,1190 3262.5,1190 3307.5,1190 3532.5,1190 3577.5,1190 3622.5,1190 3667.5,1190 3712.5,1190 90,1235 135,1235 180,1235 225,1235 270,1235 315,1235 360,1235 405,1235 450,1235 495,1235 630,1235 675,1235 720,1235 765,1235 810,1235 855,1235 2745,1235 2790,1235 2835,1235 3105,1235 3240,1235 3285,1235 3510,1235 3555,1235 3600,1235 3645,1235 3690,1235 112.5,1280 157.5,1280 202.5,1280 247.5,1280 337.5,1280 382.5,1280 427.5,1280 472.5,1280 517.5,1280 832.5,1280 877.5,1280 922.5,1280 3082.5,1280 3127.5,1280 3262.5,1280 3307.5,1280 3487.5,1280 3532.5,1280 3577.5,1280 3622.5,1280 3667.5,1280 3712.5,1280 90,1325 135,1325 180,1325 225,1325 450,1325 495,1325 855,1325 900,1325 1620,1325 2160,1325 2205,1325 3105,1325 3240,1325 3285,1325 3420,1325 3465,1325 3510,1325 3555,1325 3600,1325 3645,1325 3690,1325 112.5,1370 157.5,1370 427.5,1370 472.5,1370 517.5,1370 697.5,1370 742.5,1370 877.5,1370 922.5,1370 1057.5,1370 1102.5,1370 1147.5,1370 2137.5,1370 2182.5,1370 3397.5,1370 3442.5,1370 3487.5,1370 3532.5,1370 3577.5,1370 3622.5,1370 3667.5,1370 3712.5,1370 90,1415 135,1415 900,1415 1080,1415 1125,1415 1620,1415 3600,1415 112.5,1460 157.5,1460 292.5,1460 877.5,1460 922.5,1460 1057.5,1460 1102.5,1460 1147.5,1460 1192.5,1460 1642.5,1460 2677.5,1460 3307.5,1460 3622.5,1460 90,1505 135,1505 450,1505 495,1505 1080,1505 2070,1505 2250,1505 2295,1505 3285,1505 3510,1505 3555,1505 3600,1505 3645,1505 3690,1505 112.5,1550 157.5,1550 292.5,1550 427.5,1550 472.5,1550 517.5,1550 1057.5,1550 2092.5,1550 2227.5,1550 2272.5,1550 2317.5,1550 2857.5,1550 3307.5,1550 3487.5,1550 3532.5,1550 3577.5,1550 3622.5,1550 3667.5,1550 3712.5,1550 90,1595 135,1595 450,1595 495,1595 540,1595 765,1595 990,1595 1035,1595 1080,1595 1260,1595 1305,1595 1350,1595 1395,1595 1440,1595 1485,1595 2205,1595 2250,1595 2295,1595 2655,1595 2700,1595 2835,1595 2970,1595 3015,1595 3060,1595 3285,1595 3330,1595 3465,1595 3510,1595 3555,1595 3600,1595 3645,1595 3690,1595 112.5,1640 157.5,1640 292.5,1640 427.5,1640 472.5,1640 517.5,1640 562.5,1640 787.5,1640 832.5,1640 877.5,1640 922.5,1640 967.5,1640 1012.5,1640 1057.5,1640 1372.5,1640 1417.5,1640 1462.5,1640 2677.5,1640 2722.5,1640 2767.5,1640 2812.5,1640 2857.5,1640 2992.5,1640 3037.5,1640 3397.5,1640 3442.5,1640 3487.5,1640 3532.5,1640 3577.5,1640 3622.5,1640 3667.5,1640 3712.5,1640 90,1685 135,1685 180,1685 270,1685 450,1685 495,1685 540,1685 585,1685 630,1685 675,1685 810,1685 855,1685 900,1685 945,1685 990,1685 1035,1685 1080,1685 1440,1685 1485,1685 3375,1685 3420,1685 3465,1685 3510,1685 3555,1685 3600,1685 3645,1685 3690,1685 112.5,1730 157.5,1730 202.5,1730 247.5,1730 292.5,1730 472.5,1730 517.5,1730 562.5,1730 607.5,1730 652.5,1730 787.5,1730 832.5,1730 877.5,1730 922.5,1730 967.5,1730 1012.5,1730 1057.5,1730 1462.5,1730 2677.5,1730 2722.5,1730 2767.5,1730 2812.5,1730 2857.5,1730 2992.5,1730 3037.5,1730 3307.5,1730 3622.5,1730 90,1775 225,1775 270,1775 315,1775 360,1775 540,1775 585,1775 630,1775 675,1775 810,1775 855,1775 900,1775 945,1775 990,1775 1035,1775 1080,1775 2655,1775 2700,1775 2745,1775 2790,1775 2835,1775 2970,1775 3015,1775 3060,1775 3600,1775 382.5,1820 517.5,1820 562.5,1820 607.5,1820 652.5,1820 697.5,1820 877.5,1820 922.5,1820 967.5,1820 1012.5,1820 1057.5,1820 1822.5,1820 3307.5,1820 3532.5,1820 3577.5,1820 3622.5,1820 3667.5,1820 3712.5,1820 90,1865 225,1865 360,1865 405,1865 540,1865 585,1865 630,1865 675,1865 945,1865 990,1865 1035,1865 1080,1865 3465,1865 3510,1865 3555,1865 3600,1865 3645,1865 3690,1865 652.5,1910 1282.5,1910 2857.5,1910 2992.5,1910 3037.5,1910 3262.5,1910 3307.5,1910 3352.5,1910 3397.5,1910 3442.5,1910 3487.5,1910 3532.5,1910 3577.5,1910 3622.5,1910 3667.5,1910 3712.5,1910 90,1955 2835,1955 2970,1955 3015,1955 3060,1955 3240,1955 3285,1955 3330,1955 3375,1955 3420,1955 3465,1955 3510,1955 3555,1955 3600,1955 3645,1955 3690,1955 922.5,2000 967.5,2000 1012.5,2000 2182.5,2000 2587.5,2000 2632.5,2000 2857.5,2000 2992.5,2000 3037.5,2000 3262.5,2000 3307.5,2000 3352.5,2000 3397.5,2000 3442.5,2000 3487.5,2000 3532.5,2000 3577.5,2000 3622.5,2000 3667.5,2000 3712.5,2000 675,2045 720,2045 765,2045 810,2045 855,2045 900,2045 945,2045 990,2045 2520,2045 2565,2045 2610,2045 2655,2045 2970,2045 3015,2045 3060,2045 3240,2045 3285,2045 3330,2045 3375,2045 3420,2045 3465,2045 3510,2045 3555,2045 3600,2045 3645,2045 3690,2045 337.5,2090 652.5,2090 697.5,2090 742.5,2090 787.5,2090 832.5,2090 877.5,2090 922.5,2090 967.5,2090 1012.5,2090 1597.5,2090 1642.5,2090 1687.5,2090 1822.5,2090 1867.5,2090 2002.5,2090 2857.5,2090 2992.5,2090 3037.5,2090 3262.5,2090 3307.5,2090 3352.5,2090 3397.5,2090 3442.5,2090 3487.5,2090 3532.5,2090 3577.5,2090 3622.5,2090 3667.5,2090 3712.5,2090 630,2135 675,2135 945,2135 990,2135 1980,2135 2025,2135 2070,2135 2115,2135 2160,2135 2205,2135 2970,2135 3015,2135 3060,2135 3285,2135 3330,2135 3375,2135 3420,2135 3465,2135 3510,2135 3555,2135 3600,2135 3645,2135 3690,2135 112.5,2180 157.5,2180 202.5,2180 247.5,2180 292.5,2180 652.5,2180 697.5,2180 922.5,2180 967.5,2180 1507.5,2180 1552.5,2180 1597.5,2180 1642.5,2180 1687.5,2180 1822.5,2180 1867.5,2180 1912.5,2180 1957.5,2180 2002.5,2180 2047.5,2180 2092.5,2180 2182.5,2180 2992.5,2180 3037.5,2180 3307.5,2180 3352.5,2180 3397.5,2180 3442.5,2180 3487.5,2180 3532.5,2180 3577.5,2180 3622.5,2180 3667.5,2180 3712.5,2180 90,2225 135,2225 180,2225 225,2225 270,2225 315,2225 360,2225 405,2225 630,2225 675,2225 1395,2225 1440,2225 1485,2225 1530,2225 1575,2225 1620,2225 1665,2225 1800,2225 1845,2225 1890,2225 1935,2225 1980,2225 2025,2225 2070,2225 2475,2225 2520,2225 2565,2225 2610,2225 2700,2225 2745,2225 2790,2225 2835,2225 2880,2225 2925,2225 2970,2225 3015,2225 3060,2225 3375,2225 3420,2225 3465,2225 3510,2225 3555,2225 3600,2225 3645,2225 3690,2225 292.5,2270 337.5,2270 382.5,2270 652.5,2270 697.5,2270 1327.5,2270 1372.5,2270 1417.5,2270 1462.5,2270 1507.5,2270 1552.5,2270 1597.5,2270 1822.5,2270 1867.5,2270 1912.5,2270 1957.5,2270 2002.5,2270 2047.5,2270 2092.5,2270 2452.5,2270 2497.5,2270 2542.5,2270 2587.5,2270 2722.5,2270 2857.5,2270 2902.5,2270 2947.5,2270 2992.5,2270 3037.5,2270 3397.5,2270 3442.5,2270 3487.5,2270 3712.5,2270 360,2315 405,2315 450,2315 585,2315 1305,2315 1350,2315 1395,2315 1440,2315 1485,2315 1935,2315 1980,2315 2025,2315 2070,2315 2475,2315 2520,2315 2565,2315 2880,2315 2925,2315 3060,2315 3420,2315 337.5,2360 382.5,2360 427.5,2360 1282.5,2360 1327.5,2360 1372.5,2360 1417.5,2360 1462.5,2360 1957.5,2360 2002.5,2360 2047.5,2360 2092.5,2360 2137.5,2360 2182.5,2360 2272.5,2360 2362.5,2360 2407.5,2360 2452.5,2360 2497.5,2360 2542.5,2360 2857.5,2360 2902.5,2360 3397.5,2360 3442.5,2360 3712.5,2360 360,2405 1395,2405 1440,2405 1935,2405 1980,2405 2520,2405 2565,2405 2610,2405 2655,2405 2700,2405 2745,2405 2790,2405 2835,2405 2880,2405 2925,2405 3420,2405 292.5,2450 337.5,2450 1372.5,2450 1417.5,2450 1462.5,2450 1957.5,2450 2002.5,2450 2542.5,2450 2587.5,2450 2632.5,2450 2677.5,2450 2722.5,2450 2767.5,2450 2812.5,2450 2857.5,2450 2902.5,2450 3397.5,2450 3442.5,2450 3487.5,2450 3712.5,2450 90,2495 135,2495 180,2495 225,2495 270,2495 315,2495 360,2495 630,2495 720,2495 945,2495 1035,2495 1125,2495 1170,2495 1215,2495 1260,2495 1305,2495 1350,2495 1395,2495 1440,2495 1485,2495 1530,2495 1575,2495 1620,2495 1665,2495 1710,2495 1755,2495 1800,2495 3375,2495 3420,2495 3465,2495 3510,2495 3555,2495 3600,2495 3645,2495 3690,2495
  other v2: 1612,1578
  other v6: 709,1477
heater_1: P4.9 U3.22 | length 1750.6
  Top Layer w8: v2(1691,1466) 1726.75,1466 1803.89,1543.15 U3.22
  Bottom Layer w8: 673,2400 673,2366 705,2334 911,2334 1691,1554 v2(1691,1466) ; 674.17,2400 P4.9
heater_2: P4.8 U3.23 | length 1805.5
  Top Layer w8: v2(1690,1437) 1716.13,1437 1802.59,1523.46 U3.23
  Bottom Layer w8: P4.8@753,2441 P4.8@753,2443 ; P4.8@754,2441 754,2367 772,2349 923.62,2349 1722,1550.62 1722,1524 ; v2(1690,1437) 1706,1437 1722,1453 1722,1524 ; 1722,1474 1722,1524
heater_3: P4.7 U3.26 | length 1587.4
  Top Layer w8: v2(1751,1445) 1770.41,1464.41 U3.26
  Bottom Layer w8: P4.7 833.62,2383.38 855,2362 962,2362 996,2328 ; P4.7@834,2439 P4.7@834,2442 ; 995,2327 1751,1571 v2(1751,1445)
HEATER_4: P4.6 U3.27 | length 1495.9
  Top Layer w8: v2@1782.28,1444.72 U3.27
  Bottom Layer w8: P4.6 912.36,2400.64 936,2377 989,2377 ; 989,2376 993,2376 1022,2347 ; 1022.5,2347.5 1782,1588 v2(1782,1445)
inc: R22.2 U3.11 | length 1783.3
  Top Layer w8: U3.11 2088.15,1697.85 v2(2109,1677) ; v2(3236,1677) 3236,1442 3455,1223 R22.2
  Bottom Layer w8: v2(2109,1677) v2(3236,1677)
NetBEEP1_1: BEEP1.1 R56.1 R58.2 | length 863.1
  Top Layer w8: R56.1@1191,1524 BEEP1.1 1349,1673 1398,1722 1398,1956 1432,1990 1562,1990 1583.06,1968.94 R58.2
NetBEEP1_2: BEEP1.2 Q14.3 R58.1 | length 553.3
  Top Layer w8: BEEP1.2 1358,1873 1385,1900 1385,1973 1451.21,2039.21 Q14.3 1516.21,2028 R58.1
NetC20_2: C20.2 U3.31 | length 155.3
  Top Layer w8: C20.2 U3.31
NetC21_2: C21.2 U3.47 | length 119.9
  Top Layer w8: C21.2 2265.31,1128.37 U3.47
NetC22_2: C22.2 L1.1 U3.13 | length 513.2
  Top Layer w8: C22.2 1775.06,1955.94 L1.1 1777,1930 1803,1904 1824,1883 2020,1883 2048.78,1854.22 U3.13
NetC23_2: C23.2 R1.2 U3.7 | length 498.7
  Top Layer w8: R1.2 C23.2 1921,1933.74 1926.87,1927.87 1955.74,1899 2140,1899 2166.89,1872.11 U3.7
NetC30_2: C30.2 R9.2 U3.20 | length 237.9
  Top Layer w8: R9.2 1723.06,1519 C30.2 1724.57,1582.52 U3.20
NetC137_1: C137.1 D4.2 L3.1 U6.8 | length 744.5
  Top Layer w40: D4.2 422.25,1152.75 527.21,1047.79 L3.1 574.59,1314.59 605,1345 ; 605,1385 605,1345 ; C137.1 633,1317 605,1345
NetC137_2: C137.2 U6.1 | length 134.4
  Top Layer w40: C137.2 787,1317 805,1335 805,1390
NetD2_2: D2.2 R17.1 R18.1 | length 196.6
  Top Layer w10: R18.1 305.98,1922 R17.1 310,1880 293.27,1863.27 D2.2
NetD3_2: D3.2 R20.1 SW1.2 | length 157.8
  Top Layer w8: D3.2 3522.49,1742.51 SW1.2
NetD7_2: D7.2 R21.1 SW2.2 | length 157.1
  Top Layer w8: D7.2 3524.16,1432.51 SW2.2
NetD9_2: D9.2 R22.1 SW3.2 | length 150.8
  Top Layer w8: D9.2@3376.15,1123.67 SW3.2
NetD10_2: D10.2 R23.1 SW4.2 | length 157
  Top Layer w8: D10.2 3373.51,812 SW4.2
NetD71_2: D71.2 F4.1 R185.1 U52.4 | length 638.5
  Top Layer w40: U52.4 841.4,618.6 893,567 F4.1 1195,670 1144,721 R185.1
NetP2_1: P2.1 R32.1 | length 117.4
  Top Layer w8: R32.1 2759,1343 P2.1
NetP3_1: P3.1 Q1.3 R55.1 | length 336.2
  Top Layer w8: P3.1 2776,170 Q1.3
NetP3_2: P3.2 Q2.2 R6.1 | length 584.1
  Top Layer w8: P3.2 2875,355 2911,391 3043,391 3082.4,430.4 Q2.2 ; Q2.2@3082.4,494 Q2.2 ; R6.1 3154,495 3143.79,484.79 Q2.2
NetP5_3: P5.3 R10.1 TVS3.2 | length 229
  Top Layer w8: P5.3 2307.52,2292.52 R10.1 TVS3.2
NetP5_4: P5.4 R63.1 TVS4.2 | length 225.1
  Top Layer w8: TVS4.2 R63.1 2226.81,2290.19 P5.4
NetP6_1: P6.1 Q3.3 R14.1 | length 534.1
  Top Layer w8: R14.1 3277.63,414.63 Q3.3 3414.43,271.43 3352,209 P6.1
NetQ3_1: Q3.1 R16.1 | length 65
  Top Layer w8: Q3.1 R16.1
NetQ4_1: Q4.1 R18.2 | length 95.2
  Top Layer w10: Q4.1 151,1925.02 R18.2
NetQ4_3: Q4.3 R19.1 U1.2 U1.4 | length 520.2
  Top Layer w10: R19.1 121.98,2091.98 144.43,2114.43 Q4.3 299.43,2114.43 339.6,2154.6 U1.4 418.62,2131.38 435,2115 505,2115 518.62,2128.62 U1.2
NetQ5_1: Q5.1 R8.1 R11.2 | length 139.3
  Top Layer w10: R8.1 2440,903 Q5.1@2447,910 ; Q5.1@2449,912 2449.94,912.94 R11.2
NetQ6_1: Q6.1 R12.1 | length 80
  Top Layer w10: R12.1@2370,760 Q6.1
NetQ6_3: Q6.3 R11.1 | length 271.6
  Top Layer w10: R11.1 2509,792 2549,752 Q6.3@2549,721
NetQ14_1: Q14.1 R57.2 R59.1 | length 164.2
  Top Layer w8: Q14.1 1467.6,1855.4 R59.1 1470,1778.94 R57.2
NetR3_2: R3.2 R4.1 | length 70.4
  Top Layer w8: R3.2 1058,2028.06 R4.1
NetR4_2: R4.2 R5.1 U10.3 | length 193.7
  Top Layer w8: R5.1 1119,2098.94 R4.2 1230.45,2097 U10.3
NetR10_2: R10.2 U3.42 | length 2427.4
  Top Layer w8: v2(2166.89,1181.89) U3.42 ; v2(2305,2187) R10.2 ; v2@2897,1200 v2(2897,2187)
  Bottom Layer w8: v2(2166.89,1181.89) 2876.89,1181.89 v2(2897,1202) ; v2(2305,2187) v2(2897,2187)
NetR31_2: R31.2 U3.1 | length 279.2
  Top Layer w8: U3.1 2285,1809.94 R31.2
NetR63_2: R63.2 U3.59 | length 1955.9
  Top Layer w8: v2(2227,2187) R63.2 ; U3.59 2441.85,1543.15 v2(2475,1510) ; v2(2930,1545) v2(2930,2165)
  Bottom Layer w8: v2(2227,2187) 2249,2165 v2(2930,2165) ; v2(2475,1510) 2505,1510 ; 2500,1510 2505,1510 ; v2(2930,1545) 2895,1510 2505,1510
NetR179_1: R179.1 U6.5 | length 138.3
  Top Layer w10: U6.5 606.64,1626.64 617,1637 R179.1
NetR185_2: R185.2 R186.2 U52.5 | length 332
  Top Layer w40: U52.5 949.46,689.46 981,721 R185.2 R186.2
ok: R21.2 U3.9 | length 1607.8
  Top Layer w8: U3.9 2127,1740.52 2127,1806 v2(2146,1825) ; v2(3237,1825) 3260,1802 3260,1723 3455,1528 R21.2@3455,1491.57
  Bottom Layer w8: v2(2146,1825) v2(3237,1825)
OSC_IN: C26.2 U3.5 Y1.2 | length 327.2
  Top Layer w8: U3.5 2206.26,1884.26 2256.67,1934.67 Y1.2 ; 2290.72,2025.06 C26.2
OSC_OUT: C34.2 U3.6 Y1.1 | length 343.2
  Top Layer w8: C34.2 Y1.1@2086.94,2015.06 ; Y1.1@2111,1976 2111,1968 2186.57,1892.43 U3.6
PT2_1: P10.2 R52.1 U3.14 | length 1327.6
  Top Layer w8: v2(2011,1851) 2029.09,1832.91 U3.14 ; P10.2 2645.2,2203.8 2718,2131 v2(2718,2100) R52.1
  Bottom Layer w8: v2(2011,1851) 2011,2030 2081,2100 2168,2100 2245,2100 v2(2718,2100)
PT2_2: R53.1 R81.2 U3.15 | length 1012.9
  Top Layer w8: U3.15 v2(2009.41,1819.41) ; v2(2788,1877) R53.1 2793,1934 R81.2
  Bottom Layer w8: v2(2009.41,1819.41) 2066.41,1819.41 2124,1877 v2(2788,1877)
PT_VREF: C1.2 C18.2 C19.2 C27.2 C28.2 C29.2 C31.2 C32.2 FB1.2 L1.2 Q1.1 Q2.1 R1.1 R7.1 R15.1 R31.1 R32.2 R52.2 R53.2 R54.2 U3.19 U3.32 U3.48 U3.64 U10.5 | length 7519.6
  Top Layer w8: R31.1 2489,2017 2531.94,1974.06 2531.94,1911.06 2580.06,1911.06 2598,1929 R53.2 2728.94,1967.06 2718,1978 R52.2 R52.2@2711.06,1997 ; R54.2 v2(2803.06,655) 2803.06,613.56 Q1.1 ; R7.1 v2(2959,491) Q2.1@3001.39,491 ; R15.1 v2@3351,592
  Top Layer w10: U10.5 v2(1428.37,2175.37) ; C31.2 1778,1649 1824.8,1602.2 U3.19 v2(1974.2,1602.2) ; C29.2 1778,1298 1826.3,1346.3 U3.32 v8(1971.7,1346.3) ; v2(1743,2014) 1845,2014 R1.1 ; 2261.43,1641.57 2326,1641.57 U3.64 2488.57,1641.57 2501,1654 C27.2 C27.2@2531.94,1658 ; v2(2317,1248) 2316.87,1247.87 U3.48 2285,1218 2330,1173 C28.2 2463,1129.06 C18.2 ; C1.2@2527.94,1781 C1.2 ; R32.2 2698.94,1310.94 2689,1301 v2(2689,1248) 2689,1116 2803.06,1001.94 R54.2
  Top Layer w20: v8(1971.7,1346.3) 1971.7,1372.7 2009,1410 2009,1567.41 v2(1974.2,1602.2) 2013.57,1641.57 2326,1641.57 ; C1.2@2527.94,1781 C1.2@2527.94,1785 ; v4(2528,1915) 2531.94,1911.06 C1.2 C19.2 C27.2@2531.94,1658
  Top Layer w30: v5(1266,1094) 1266,725 1368,623 FB1.2
  Bottom Layer w8: v2(2803.06,655) 2803.06,562.94 2875,491 v2(2959,491) 3250,491 v2(3352,593)
  Bottom Layer w10: v2(1428.37,2175.37) 1589.74,2014 v2(1743,2014) 1743,1833.41 v2(1974.2,1602.2)
  Bottom Layer w30: v5(1266,1094) 1422,1250 v5(1797,1250) 1832,1250 1850,1232 1931,1232 1971.7,1272.7 v8(1971.7,1346.3) 2068.7,1346.3 2167,1248 v2(2317,1248) v2(2689,1248)
  other v2: 2367,1129.06
PWR_EN: R12.2 R13.1 U3.33 | length 1003.6
  Top Layer w10: v2(1989.72,1004.72) U3.33 ; R13.1 2309.94,688.94 R12.2 2248,763 2204,807 2204,899.45 v2(2309.28,1004.72)
  Bottom Layer w10: v2(1989.72,1004.72) v2(2309.28,1004.72)
rf_rxd: P9.3 U3.54 | length 1742.3
  Top Layer w8: U3.54 2565.28,1444.72 v2(2585,1425) ; P9.3@3106,2398 3106,2252 3131,2227 3131,1495 v2(3131,1469)
  Bottom Layer w8: v2(2585,1425) 2620,1390 2890,1390 2969,1469 v2(3131,1469)
rf_txd: P9.2 U3.53 | length 1815.9
  Top Layer w8: U3.53 v2(2545,1425) ; v2(3109,1371) 3151,1413 3151,2227 3208,2284 P9.2@3208,2398
  Bottom Layer w8: v2(2545,1425) 2599,1371 v2(3109,1371)
set: R20.2 U3.10 | length 1461.4
  Top Layer w8: U3.10 2107.83,1819.83 v2(2143,1855) ; v2(3416.37,1807.06) R20.2
  Bottom Layer w8: v2(2143,1855) 3348.74,1855 3396.68,1807.06 v2(3416.37,1807.06)
SPEAK: R57.1 U3.36 | length 1176.2
  Top Layer w8: v2(1530,1180) R57.1 ; U3.36 2048.78,1195.22 v2(2049,1195)
  Bottom Layer w8: v2(1530,1180) 2034,1180 v2(2049,1195)
SWCLK: P22.4 U3.49 | length 1005.2
  Top Layer w8: v2(2249,1366) 2268.7,1346.3 U3.49
  Bottom Layer w8: v2(2249,1366) 2386,1366 2474,1454 2600,1454 2642,1412 2863,1412 2976,1525 P22.4
SWDIO: P22.2 U3.46 | length 881.8
  Top Layer w8: U3.46 v2(2245.63,1329.37)
  Bottom Layer w8: v2(2245.63,1329.37) 2299,1329.37 2343.37,1285 2971,1285 P22.2
USB_ID: U3.43
USB_N: D8.2 J1.A7 J1.B7 P1.2 U3.44 | length 2400.9
  Top Layer w8: D8.2 1799.31,708.51 ; P1.2 1800.8,517.37 1800.8,901.25 1857.54,958 2120,958 2208.1,1046.1 2208.1,1208.16 2206.26,1210 U3.44 ; J1.B7 2357.47,222.53 2365,215 2390,215 2396.84,221.84 J1.A7 ; J1.A7@2395,264 2395,388.89 2402,395.89 v2(2402,400)
  Bottom Layer w8: P1.2 1801.8,518.37 1801.8,659.42 1838.37,696 2261.63,696 2396,561.63 v2@2396,406
USB_P: D5.2 J1.A6 J1.B6 P1.3 U3.45 | length 2431.5
  Top Layer w8: 1819.28,709.51 D5.2 ; P1.3 1818.8,517.37 1818.8,893.8 1865,940 2124.63,940 2224.1,1039.47 2224.1,1208.16 2225.94,1210 U3.45 ; v2(2374,400) 2379,395 2379,286.84 ; J1.B6 v2(2416.53,303.47)
  Top Layer w10: J1.A6 2377.16,285 2379,286.84
  Bottom Layer w8: P1.3 1817.8,518.37 1817.8,652.8 1845,680 2255,680 2380,555 2380,406 v2(2374,400) 2374,321 2391.53,303.47 v2(2416.53,303.47)
VCC_3.3V: C4.2 C146.2 F4.2 FB1.1 | length 363
  Top Layer w40: C4.2 C4.2 F4.2 1197.83,387 FB1.1
VCC_5V: C3.1 C67.1 C68.1 L3.2 P8.1 Q5.2 R8.2 U6.4 U52.1 U52.2 | length 4162
  Top Layer w40: v7(690,325) 755,325 792,362 U52.1 U52.2 ; U6.4 v4(912,1552) 958,1552 995,1515 995,1247 990,1242 ; L3.2 924.98,1194.98 972,1242 990,1242 ; P8.1 1455,895 1423,927 C67.1 C3.1 990,1242 ; v3(2276,839) 2441,839 Q5.2@2448,832
  Bottom Layer w40: v7(690,325) 690,850 735,895 P8.1 1581,895 1698,778 2216,778 2276,838 v3@2277,838
VCC_5V_DRV: P5.1 P7.1 P9.1 Q5.3 R6.2 R14.2 R55.2 R56.2 | length 6802.9
  Top Layer w10: v2(1248.06,1483.58) R56.2 ; v2(1497.42,1088.58) v2(1497.42,1483.58) ; R55.2 v2(2884,428) ; v3(3133,1003) 3133,642 3154,621 R6.2 3182.94,574.06 3196,561 v2(3196,438) 3196.94,437.06 R14.2
  Top Layer w30: P7.1 1847,2455 1903,2511 2468,2511 ; P5.1 2465,2508 2468,2511 ; Q5.3 2581.63,870.63 v3(2654,943) ; v3(3133,1003) 3133,1188 3185,1240 3185,2128 3309,2252 P9.1 3309,2497 3295,2511 2468,2511
  Bottom Layer w10: v2(1248.06,1483.58) v2(1497.42,1483.58) ; v2(1497.42,1088.58) 1529,1057 2612,1057 2654,1015 v3(2654,943) ; v2(2884,428) 3186,428 v2(3196,438)
  Bottom Layer w30: v3(2654,943) 2714,1003 v3(3133,1003)
VIN_BAT: C2.1 C54.2 C162.1 D1.2 Q4.2 R3.1 R17.2 R179.2 U1.5@457.41,2021.72 U1.6 U1.7 U1.8@539.83,2021.72 U6.7 | length 2149.4
  Top Layer w10: D1.2 1056.25,1934.25 1116,1994 R3.1
  Top Layer w20: R179.2 725.06,1755.06 808,1838 D1.2
  Top Layer w40: Q4.2 281.98,2016 R17.2 423.67,1987.98 457.41,2021.72 U1.5@459.25,2019.88 ; C54.2 358.06,1446.06 C2.1 C162.1 359,1699 459.25,1799.25 U1.6@459.25,1934.22 ; C2.1@364,1452 U6.7 ; U1.8@539.83,2021.72 618.28,2021.72 705.75,1934.25 D1.2
VUSB: D6.2 J1.A4 J1.A9 J1.B4 J1.B9 P1.1 P8.2 | length 1729
  Top Layer w15: 2280,160 2298.91,178.91 J1.A4@2298.91,243.7 ; 2310,150 2440,150 2475.58,185.58 2475.58,203.69 2475.09,204.18 2475.09,255.51 J1.A9
  Top Layer w20: P8.2 1507,743 1534.49,715.51 D6.2 1638,592 1672,558 P1.1 1672,218 1740,150 2270,150 ; 2280,160 2270,150 ; 2310,150 2270,150
pads on no net: J1.2 J1.A5 J1.A8 J1.B5 J1.B8 P4.1 P5.5 P5.6 R17.0 R18.0 R19.0 U1.5@414.88,2062.08 U1.5@418.62,1934.22 U1.8@568.62,1934.22 U1.8@572.36,2062.08 U3.2 U3.3 U3.4 U3.25 U3.28 U3.34 U3.35 U3.37 U3.38 U3.39 U3.40 U3.41 U3.50 U3.56 U3.57 U3.61 U3.62 U6.2 U6.3

## Polygon pours and split planes (outlines as drawn)
GND on Top Layer "L1_TOP-No Net" (solid, remove dead copper, pour order 0): 424,2553 570,2699 3991,2699 3991,1 3860,-130 -157,-130 -157,2564 -167,2574 -31,2710 607,2710
GND on Bottom Layer "L1_TOP-No Net" (solid, remove dead copper, pour order 1): -292,2800 4399,2800 4518,2681 4093,2256 4093,-229 -279,-229 -327,-277 -195,-145 -195,2800

## Keep-outs
Keep-Out Layer:
  lines w10: 11,8 11,2545 3768,2545 3768,8 11,8

## Silkscreen, mask and mechanical layers (free items; w line width, h text height)
Top Overlay:
  text "异面线" at 2165,2583 h40
Mechanical 1:
  lines w10: 0,2559.06 3779.53,2559.06 3779.53,0 0,0 0,2560